# Altium PCB PCB1.PcbDoc
Units mil, origin at the board's own origin, x right, y up, seen from the top; angles counter-clockwise.
Board outline 820 x 345 mil, 2 copper layers (Top Layer, Bottom Layer); 4 components, 3 nets, 13 pads, 0 vias.
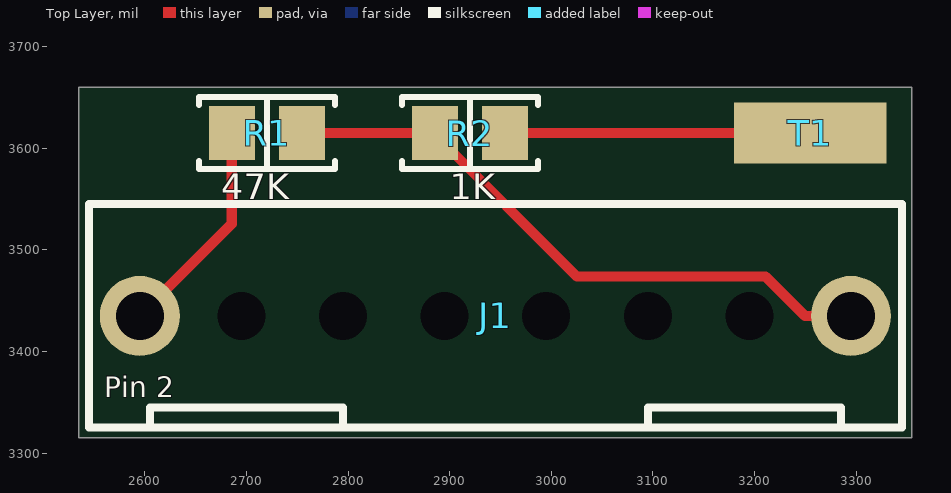
[diagram p0: Top Layer view]
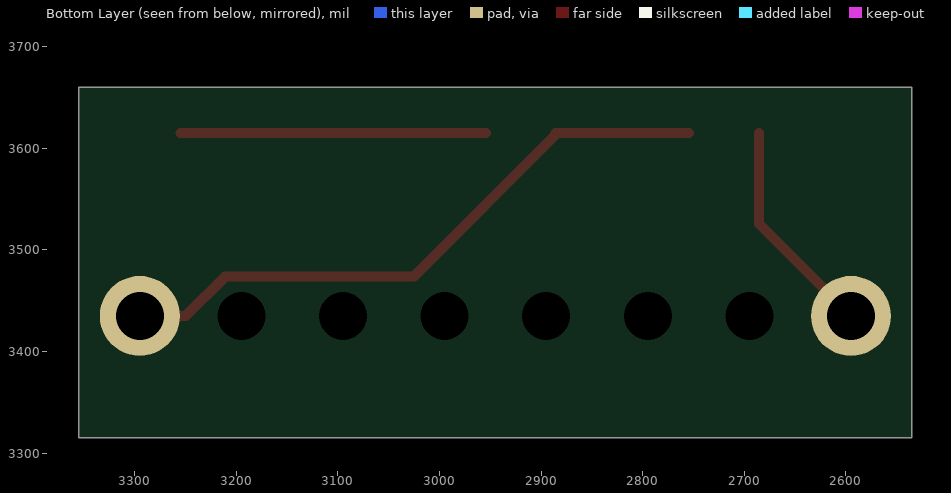
[diagram p1: Bottom Layer view, seen from below]
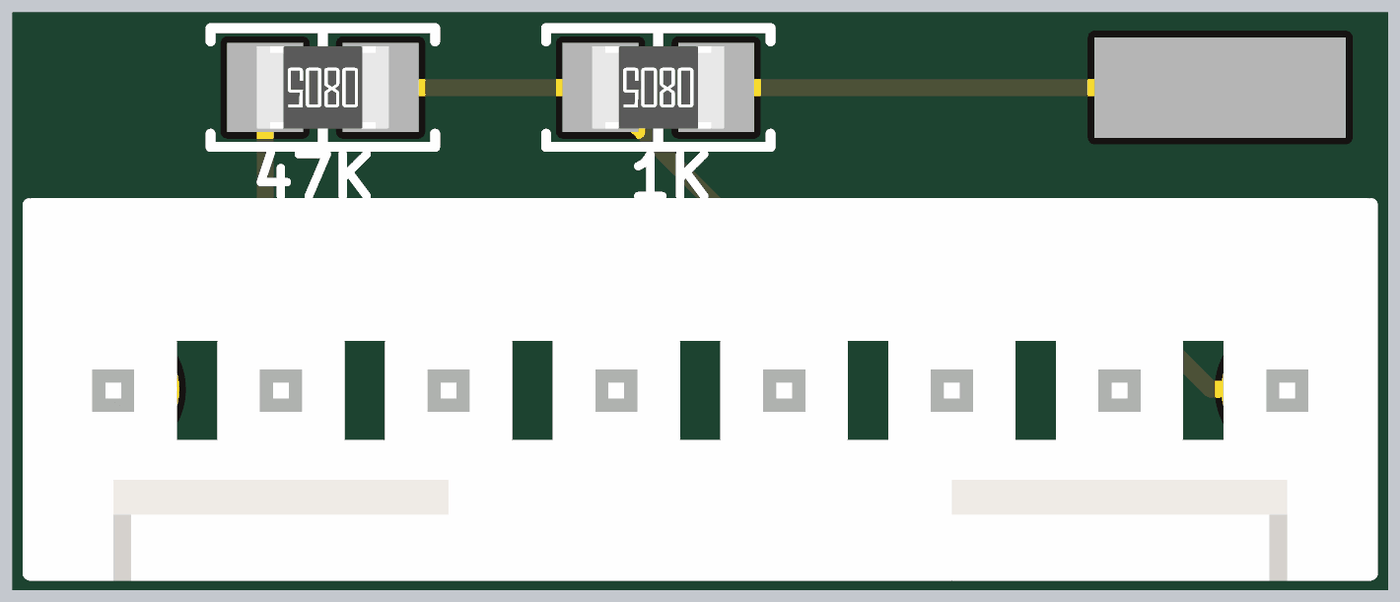
[diagram p2: 3D render of the assembled board from above, using the file's embedded part models]

## Layer stack, top to bottom
Top Solder: solder mask 0.4, Solder Resist, Dk 3.5
Top Layer: signal copper 1.4
Dielectric 1: dielectric 12.6, FR-4, Dk 4.8
Bottom Layer: signal copper 1.4
Bottom Solder: solder mask 0.4, Solder Resist, Dk 3.5

## Board outline
2535,3315 2535,3660 3355,3660 3355,3315

## Design rules (kind name [scope] priority, off if disabled: settings)
Clearance [All] p1: gap=10 ignorepadtopadclearanceinfootprint=FALSE except(0: Arc-Hole Track-Hole SMDPad-Hole THPad-Hole Via-Hole Fill-Hole Poly-Hole Region-Hole Text-Hole)
PolygonConnect [All] p1: connectstyle=Relief reliefconductorwidth=10 reliefentries=4 polygonreliefangle="90 Angle" airgapwidth=10
RoutingVias [All] p1: holewidth=28 width=50 viastyle="Through Hole" minholewidth=28 minwidth=50 maxholewidth=28 maxwidth=50
SolderMaskExpansion [All] p1: expansion=4 istentingtop=FALSE
Width [All] p1: maxlimit=10 minlimit=10 preferedwidth=10
30 further rules are at their usual default settings.

## Components (designator, comment, footprint, x,y, rotation, side; value= is the part's Value field where it differs from the comment)
J1 "0022272081" "MOLEX KK 0022272081" 2945,3435 r0 top
R1 "47 kOhms" "RES 0805_2012" 2720,3615 r180 top
R2 "1 kOhms" "RES 0805_2012" 2920,3615 r180 top
T1 "TestPoint" TestPoint 3255,3615 r180 top

## Footprints (in the part's own frame and the unit in brackets; to place one, negate y for a bottom-side part, rotate by r counter-clockwise, add the part's x,y. Pads: shape width x height; smd on the part's side, far side on the other; paste and mask are expansions set on the pad)
"MOLEX KK 0022272081" [mm]
  round 2 hole 1.2: 1(-8.89,0) 8(8.89,0)
  round 0 hole 1.2: 2(-6.35,0) 3(-3.81,0) 4(-1.27,0) 5(1.27,0) 6(3.81,0) 7(6.35,0)
  silkscreen extent -10.16,-2.79 10.16,2.79, body extent -10.16,-2.9 10.16,2.9, height 11.7
"RES 0805_2012" [mm] "Chip Resistor, 2-Leads, Body 2.00x1.25mm, IPC Medium Density"
  rect 1.15x1.35 smd: 1(-0.875,0) 2(0.875,0)
  silkscreen extent -1.7,-0.9 1.7,0.9, body extent -1,-0.62 1,0.63, height 0.6
TestPoint [mil]
  rect 150x60 smd: 1(0,0)

## Part data
J1: "CONN HEADER VERT 8POS 2.54MM", Insulation Color=Natural, Manufacturer=Molex, Material Flammability Rating="UL94 V-0", Supplier Part Number 1=WM4117-ND, ComponentLink1Description=Datasheet, ComponentLink1URL=https://www.molex.com/pdm_docs/sd/022272081_sd.pdf, ComponentLink2Description="DigiKey Link", ComponentLink2URL=http://digikey.com/product-detail/en/molex/0022272081/WM4117-ND/1130583, Connector Type=Header, Contact Finish - Mating=Tin, Contact Finish - Post=Tin, Contact Finish Thickness - Mating="100.0µin (2.54µm)", Contact Length - Mating="0.295\" (7.49mm)", Contact Length - Post="0.140\" (3.56mm)", Contact Material=Brass, Contact Shape=Square, Contact Type="Male Pin", Fastening Type="Friction Lock", Insulation Height="0.461\" (11.70mm)", Insulation Material="Polyamide (PA), Nylon", LastUpdated="1/12/2020 11:52:41 PM", Lifecycle Status=Active, Minimum Order=1, Mounting Type="Through Hole", Number of Positions=8, Number of Positions Loaded=All, Number of Rows=1, Overall Contact Length="0.560\" (14.22mm)", Packaging=Bulk, Part Number=0022272081, Part Status=Active, PartId=82, Pitch - Mating="0.100\" (2.54mm)", Price=0.60, Series="KK 6410", Shrouding="Shrouded - 1 Wall", Style="Board to Cable/Wire", Supplier 1=DigiKey, Termination=Solder
R1: library part RT0805DRE0747KL, "RES SMD 47K OHM 0.5% 1/8W 0805", Device Package="0805 (2012 Metric)", Manufacturer=Yageo, Operating Temperature="-55°C ~ 155°C", Power (Watts)="0.125W, 1/8W", Supplier Device Package=0805, Supplier Part Number 1=311-2867-1-ND, Temperature Coefficient=±50ppm/°C, Tolerance=±0.5%, ComponentLink1Description=Datasheet, ComponentLink1URL=https://www.yageo.com/upload/media/product/productsearch/datasheet/rchip/PYu-RT_1-to-0.01_RoHS_L_11.pdf, ComponentLink2Description="DigiKey Link", ComponentLink2URL=https://www.digikey.com/en/products/detail/yageo/RT0805DRE0747KL/1078722, Composition="Thin Film", Height - Seated (Max)="0.024\" (0.60mm)", LastUpdated="8/23/2023 7:51:35 PM", Lifecycle Status=Active, Minimum Order=1, Number of Terminations=2, Package / Case="0805 (2012 Metric)", Packaging=TapeAndReel, Part Number=RT0805DRE0747KL, Part Status=Active, PartId=31478, Price=0.01, Resistance="47 kOhms", Series=RT, Size / Dimension="0.079\" L x 0.049\" W (2.00mm x 1.25mm)", Supplier 1=DigiKey
R2: library part CPF0805B1K0E, "RES SMD 1K OHM 0.1% 1/10W 0805", Device Package="0805 (2012 Metric)", Manufacturer="TE Connectivity Passive Product", Operating Temperature="-55°C ~ 155°C", Power (Watts)="0.1W, 1/10W", Supplier Device Package=0805, Supplier Part Number 1=A106044CT-ND, Temperature Coefficient=±25ppm/°C, Tolerance=±0.1%, ComponentLink1Description=Datasheet, ComponentLink1URL=https://www.te.com/commerce/DocumentDelivery/DDEController?Action=srchrtrv&DocNm=1773200&DocType=DS&DocLang=English, ComponentLink2Description="DigiKey Link", ComponentLink2URL=https://www.digikey.com/en/products/detail/te-connectivity-passive-product/CPF0805B1K0E/2390399, Composition="Thin Film", Height - Seated (Max)="0.026\" (0.65mm)", LastUpdated="8/23/2023 7:51:47 PM", Lifecycle Status=Active, Minimum Order=1, Number of Terminations=2, Package / Case="0805 (2012 Metric)", Packaging=TapeAndReel, Part Number=CPF0805B1K0E, Part Status=Active, PartId=27725, Price=0.09, Resistance="1 kOhms", Series="CPF, Neohm", Size / Dimension="0.079\" L x 0.049\" W (2.00mm x 1.25mm)", Supplier 1=DigiKey

## Nets (pads, with @x,y where several pads share a name; then routed paths per layer and width w, separated by ;. In a path a pad name is that pad's centre, name@x,y a point inside that pad or via, vN(x,y) a via of type N, cw(c..) or ccw(c..) an arc to the next point about the centre after c; other vN are vias at no path point)
NetJ1_1: J1.1 R1.2 | length 217.5
  Top Layer w10: J1.1 2685.55,3525.55 R1.2
NetJ1_8: J1.8 R1.1 R2.2 | length 616
  Top Layer w10: R1.1 R2.2 2885.55,3613.47 3025.4,3473.62 3211,3473.62 3249.62,3435 J1.8
NetR2_1: R2.1 T1.1 | length 300.6
  Top Layer w10: R2.1 T1.1
pads on no net: J1.2 J1.3 J1.4 J1.5 J1.6 J1.7

## Silkscreen, mask and mechanical layers (free items; w line width, h text height)
Top Overlay:
  text "47K" at 2675,3550 h25
  text "1K" at 2900,3550 h25
  text "Pin 2" at 2560,3355 h20
Mechanical 1:
  the board outline again, w10